# EAGLE board Thetis_RevF5_PCB (EAGLE 9.7.0)
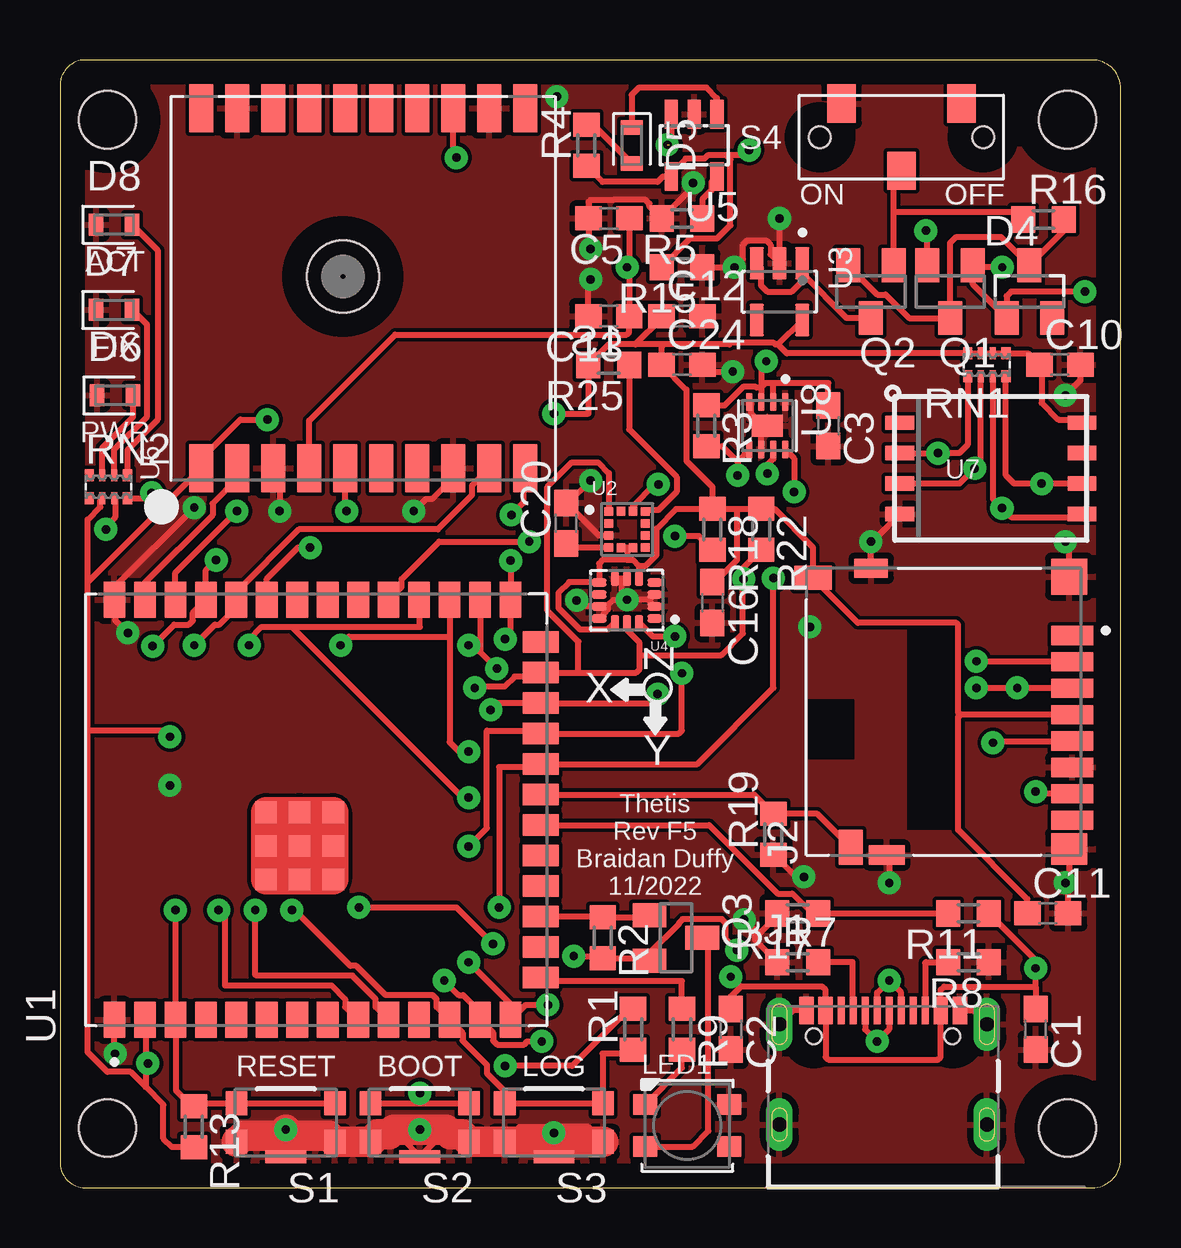
[diagram p0: board, top side]
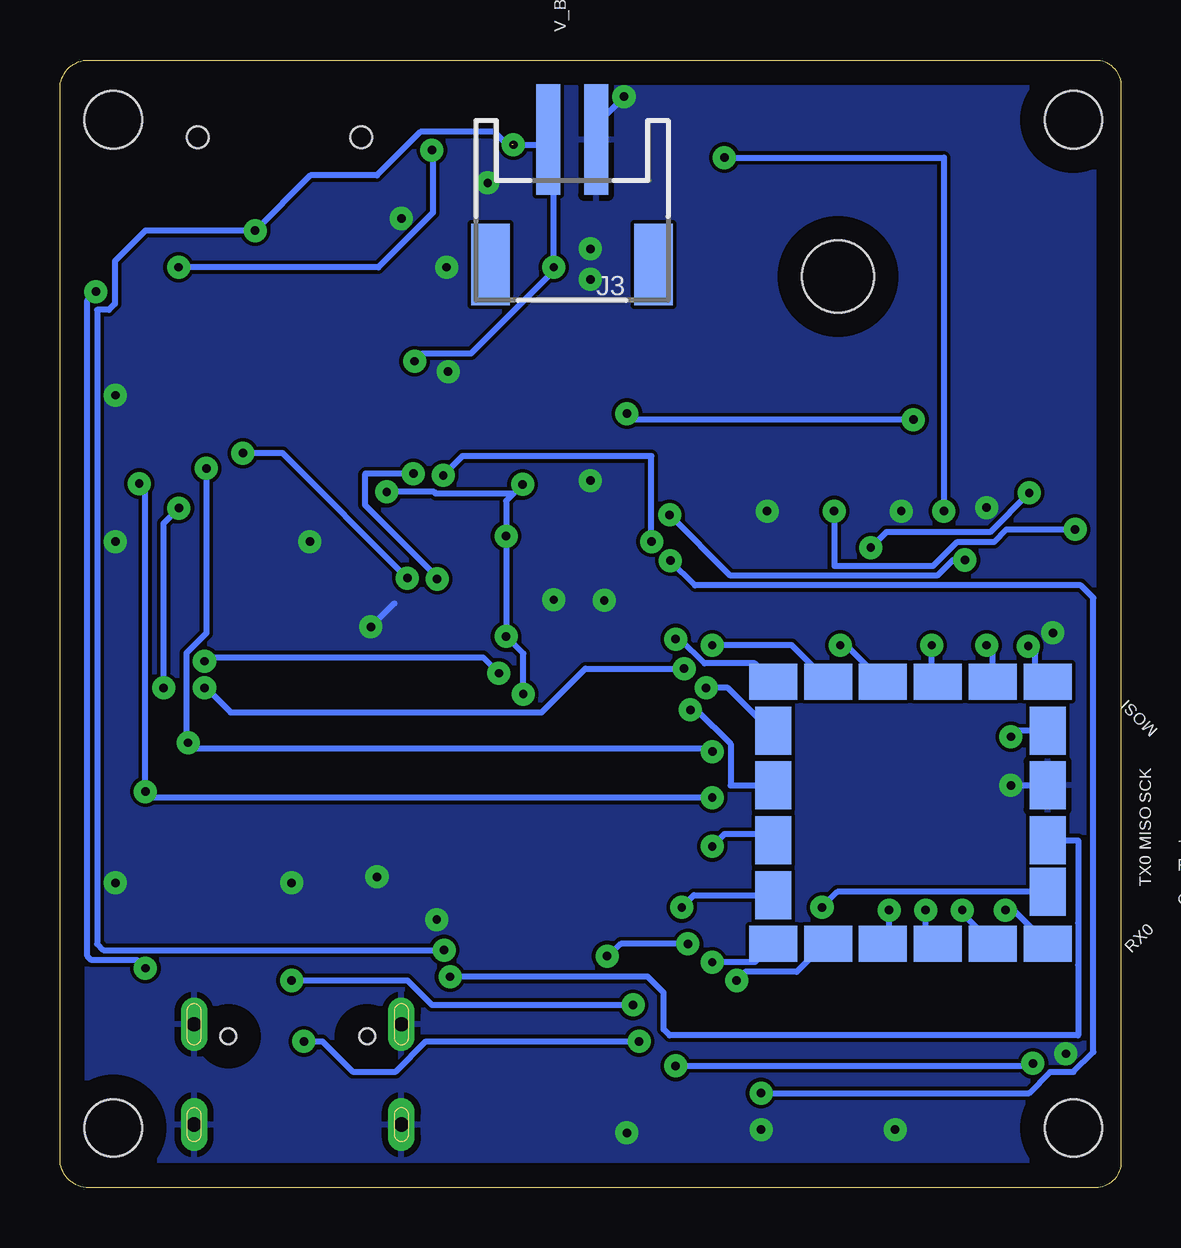
[diagram p1: board, bottom side, seen from below]

Size 44.2 x 46.99 mm. Coordinates in mm from the lower left corner, seen from the top.
Outline: 44.2,1.19 44.2,45.8 arc90 43.01,46.99 0.95,46.99 arc90 0.01,45.8 0.01,1.19 arc90 0.95,0 43.01,0 arc90 44.2,1.19
Copper layers (1*16): Top 0.035mm / dielectric 1.5mm / Bottom 0.035mm
Design rules "default *": minimum track width 6mil, minimum drill 0.3mm, track to track 6mil, track to pad 6mil, pad to pad 6mil, via to via 6mil, smd to smd 6mil, copper to edge 40mil, drill to drill 6mil, minimum pad ring 10mil, minimum via ring 12mil, stop-mask expansion 4mil, vias tented up to drill 0mil, thermal gap 10mil
Net classes: 0 default: width 0.178 mm; 1 highpower: width 0.305 mm, drill 0.483 mm; 2 lowpower: width 0.305 mm, drill 0.483 mm
Holes 2.39 mm at 1.98,2.49 1.98,44.5 41.98,44.5 41.98,2.49
tKeepout: area -0.4,42.1 to 4.4,46.9; area 39.6,42.1 to 44.4,46.9; area 39.6,0.1 to 44.4,4.9; area -0.4,0.1 to 4.4,4.9
bKeepout: area 39.6,42.1 to 44.4,46.9; area -0.4,42.1 to 4.4,46.9; area 39.6,0.1 to 44.4,4.9; area -0.4,0.1 to 4.4,4.9

## Footprints (pad centres in the part's own frame; a part is rotated, then mirrored left to right if it is on the bottom)
C0603 = smd 1.1 x 1: 1 -0.85,0; 2 0.85,0
SOT23 = smd 1 x 1.4: 1 -0.95,-1.1; 2 0.95,-1.1; 3 0,1.1
LEDC1608X65N = smd 0.612 x 0.912: A 0.75,0; C -0.75,0
LEDC1608X35N = smd 0.612 x 0.912: A 0.75,0; C -0.75,0
GCT_USB4105-GF-A = smd 0.6 x 1.15: A1_B12 -3.2,4.755; A4_B9 -2.4,4.755; B1_A12 3.2,4.755; B4_A9 2.4,4.755 | smd 0.3 x 1.15: A5 -1.25,4.755; A6 -0.25,4.755; A7 0.25,4.755; A8 1.25,4.755; B5 1.75,4.755; B6 0.75,4.755; B7 -0.75,4.755; B8 -1.75,4.755 | drill 0.6 pad 1.05 long: S1 -4.32,4.18; S4 4.32,4.18 | drill 0.6 pad 1 long: S2 -4.32,0; S3 4.32,0 | hole 0.65: 2.89,3.68; -2.89,3.68
HRS_DM3D-SF = smd 0.8 x 1.75: 1 3.2,0; 2 2.1,0; 3 1,0; 4 -0.1,0; 5 -1.2,0; 6 -2.3,0; 7 -3.4,0; 8 -4.5,0 | smd 1.3 x 1.5: S1 -5.7,0.125 | smd 1.5 x 1.5: S2 5.65,0.125 | smd 0.8 x 1.5: S3 -5.95,7.725 | smd 0.8 x 1.4: S4 6,8.375 | smd 1 x 1.55: SW-A 5.6,10.8 | smd 1.45 x 1: SW-B -5.625,9.225
JSTPH2 = smd 1 x 4.6: 1 -1,-3.7; 2 1,-3.7 | smd 1.6 x 3.4: NC1 -3.4,1.5; NC2 3.4,1.5
LED3535 = smd 1 x 0.85: 1 -1.75,0.875; 2 -1.75,-0.875; 3 1.75,-0.875; 4 1.75,0.875
R0603 = smd 1 x 1.1: 1 -0.85,0; 2 0.85,0
EXBN8V = smd 0.38 x 0.5: 1 -0.8,-0.475; 4 0.8,-0.475; 5 0.8,0.475; 8 -0.8,0.475 | smd 0.25 x 0.5: 2 -0.25,-0.475; 3 0.25,-0.475; 6 0.25,0.475; 7 -0.25,0.475
SW_KMR221GLFS = smd 0.9 x 1: 1 -2.05,0.8; 2 -2.05,-0.8; 3 2.05,-0.8; 4 2.05,0.8 | smd 1.7 x 0.55: 5 0,1.425
CL-SB-12A = smd 1.2 x 1.6: 1 -2.5,-1.4; 2 0,1.4; 3 2.5,-1.4 | hole 0.9: -3.4,0; 3.4,0
PAD-1.5X2.0 = smd 1.5 x 2: P$1 0,0
XCVR_ESP32-S2-SOLO-U-N4R2 = smd 1.5 x 0.9: 1 -8.75,8.41; 2 -8.75,7.14; 3 -8.75,5.87; 4 -8.75,4.6; 5 -8.75,3.33; 6 -8.75,2.06; 7 -8.75,0.79; 8 -8.75,-0.48; 9 -8.75,-1.75; 10 -8.75,-3.02; 11 -8.75,-4.29; 12 -8.75,-5.56; 13 -8.75,-6.83; 14 -8.75,-8.1; 27 8.75,-8.1; 28 8.75,-6.83; 29 8.75,-5.56; 30 8.75,-4.29; 31 8.75,-3.02; 32 8.75,-1.75; 33 8.75,-0.48; 34 8.75,0.79; 35 8.75,2.06; 36 8.75,3.33; 37 8.75,4.6; 38 8.75,5.87; 39 8.75,7.14; 40 8.75,8.41 | smd 0.9 x 1.5: 15 -6.985,-9.35; 16 -5.715,-9.35; 17 -4.445,-9.35; 18 -3.175,-9.35; 19 -1.905,-9.35; 20 -0.635,-9.35; 21 0.635,-9.35; 22 1.905,-9.35; 23 3.175,-9.35; 24 4.445,-9.35; 25 5.715,-9.35; 26 6.985,-9.35 | smd 0.9 x 0.9: 41_1 -2.9,2.09; 41_2 -1.5,2.09; 41_3 -0.1,2.09; 41_4 -2.9,0.69; 41_5 -1.5,0.69; 41_6 -0.1,0.69; 41_7 -2.9,-0.71; 41_8 -1.5,-0.71; 41_9 -0.1,-0.71
XDCR_LIS3MDLTR = smd 0.375 x 0.35: 1 -0.762,0.75; 2 -0.762,0.25; 3 -0.762,-0.25; 4 -0.762,-0.75; 7 0.762,-0.75; 8 0.762,-0.25; 9 0.762,0.25; 10 0.762,0.75 | smd 0.35 x 0.375: 5 -0.25,-0.762; 6 0.25,-0.762; 11 0.25,0.762; 12 -0.25,0.762
SOT95P285X140-5N = smd 1.35 x 0.6: 1 -1.185,0.95; 2 -1.185,0; 3 -1.185,-0.95; 4 1.185,-0.95; 5 1.185,0.95
PQFN50P300X250X97-14N = smd 0.61 x 0.35: 1 -1.16,0.75; 2 -1.16,0.25; 3 -1.16,-0.25; 4 -1.16,-0.75; 8 1.16,-0.75; 9 1.16,-0.25; 10 1.16,0.25; 11 1.16,0.75 | smd 0.35 x 0.61: 5 -0.5,-0.91; 6 0,-0.91; 7 0.5,-0.91; 12 0.5,0.91; 13 0,0.91; 14 -0.5,0.91
SOT23-5L = smd 0.55 x 1.2: 1 -0.95,-1.3; 2 0,-1.3; 3 0.95,-1.3; 4 0.95,1.3; 5 -0.95,1.3
FGPMMOPA6H = smd 2 x 1: P$1 -7.5,6.75; P$2 -7.5,5.25; P$3 -7.5,3.75; P$4 -7.5,2.25; P$5 -7.5,0.75; P$6 -7.5,-0.75; P$7 -7.5,-2.25; P$8 -7.5,-3.75; P$9 -7.5,-5.25; P$10 -7.5,-6.75; P$11 7.5,-6.75; P$12 7.5,-5.25; P$13 7.5,-3.75; P$14 7.5,-2.25; P$15 7.5,-0.75; P$16 7.5,0.75; P$17 7.5,2.25; P$18 7.5,3.75; P$19 7.5,5.25; P$20 7.5,6.75 | hole 3: 0.5,0.85
LGA8_8X6 = smd 1.2 x 0.6: 1 -3.8,1.905; 2 -3.8,0.635; 3 -3.8,-0.635; 4 -3.8,-1.905; 5 3.8,-1.905; 6 3.8,-0.635; 7 3.8,0.635; 8 3.8,1.905
SON50P200X200X80-9N = smd 0.76 x 0.27: 1 -0.985,0.75; 2 -0.985,0.25; 3 -0.985,-0.25; 4 -0.985,-0.75; 5 0.985,-0.75; 6 0.985,-0.25; 7 0.985,0.25; 8 0.985,0.75 | smd 0.9 x 1.3: 9 0,0

## Placement (x,y rotation side)
C1  1 uF  [C0603]  40.65,6.6 270 top
C2  1 uF  [C0603]  27.95,6.6 270 top
C3  0.1 uF  [C0603]  32.01,31.75 270 top
C5  10 uF  [C0603]  22.88,40.39 180 top
C10  1 uF  [C0603]  41.66,34.29 0 top
C11  1 uF  [C0603]  41.16,11.43 0 top
C12  1 uF  [C0603]  25.92,36.32 0 top
C13  1 uF  [C0603]  22.87,36.32 180 top
C16  0.1 uF  [C0603]  27.19,24.38 270 top
C20  0.1 uF  [C0603]  21.09,27.69 90 top
C24  0.1 uF  [C0603]  25.92,34.29 0 top
D4  BAT400  [SOT23]  40.39,37.34 0 top
D5  ORG  [LEDC1608X65N]  23.82,43.43 270 top
D6  RED  [LEDC1608X65N]  2.29,33.02 0 top
D7  RED  [LEDC1608X35N]  2.25,36.58 0 top
D8  BLU  [LEDC1608X65N]  2.25,40.13 0 top
J1  USB4105-GF-A  [GCT_USB4105-GF-A]  34.3,2.63 0 top
J2  DM3D-SF  [HRS_DM3D-SF]  42.17,19.81 90 top
J3  [JSTPH2]  22.87,39.97 180 bottom
LED1  WS2812B3535  [LED3535]  26.13,2.59 0 top
Q1  AOSS21311C  [SOT23]  37.09,37.34 180 top
Q2  AOSS21311C  [SOT23]  33.79,37.34 180 top
Q3  AOSS21311C  [SOT23]  25.66,10.41 270 top
R1  10k  [R0603]  23.88,6.6 90 top
R2  1k  [R0603]  22.61,10.41 270 top
R3  10k  [R0603]  26.93,31.75 270 top
R4  1k  [R0603]  21.93,43.43 90 top
R5  2k  [R0603]  25.92,40.39 180 top
R7  5k1  [R0603]  30.74,9.4 0 top
R8  5k1  [R0603]  37.85,9.4 180 top
R9  1k  [R0603]  25.92,6.6 270 top
R11  100k  [R0603]  37.85,11.43 180 top
R13  10k  [R0603]  5.58,2.54 270 top
R15  100k  [R0603]  25.92,38.35 180 top
R16  100k  [R0603]  40.98,40.34 0 top
R17  200k  [R0603]  30.74,11.43 180 top
R18  2.7k  [R0603]  27.19,27.43 270 top
R19  10k  [R0603]  29.73,14.73 90 top
R22  2.7k  [R0603]  29.22,27.43 270 top
R25  10k  [R0603]  22.87,34.29 180 top
RN1  10k  [EXBN8V]  38.62,34.29 180 top
RN2  1k  [EXBN8V]  2.01,29.21 0 top
S1  KMR221GLFS  [SW_KMR221GLFS]  9.41,2.72 180 top
S2  KMR221GLFS  [SW_KMR221GLFS]  14.99,2.72 180 top
S3  KMR221GLFS  [SW_KMR221GLFS]  20.58,2.72 180 top
S4  CL-SB-12X  [CL-SB-12A]  35.06,43.77 180 top
TP1  [PAD-1.5X2.0]  7.63,10.16 270 bottom
TP2  [PAD-1.5X2.0]  5.34,10.16 270 bottom
TP3  [PAD-1.5X2.0]  3.06,10.16 270 bottom
TP4  [PAD-1.5X2.0]  14.49,21.08 270 bottom
TP5  [PAD-1.5X2.0]  12.2,10.16 270 bottom
TP6  [PAD-1.5X2.0]  14.49,10.16 270 bottom
TP7  [PAD-1.5X2.0]  14.49,16.76 0 bottom
TP8  [PAD-1.5X2.0]  14.49,19.05 0 bottom
TP9  [PAD-1.5X2.0]  12.2,21.08 270 bottom
TP10  [PAD-1.5X2.0]  9.91,21.08 90 bottom
TP11  [PAD-1.5X2.0]  7.63,21.08 270 bottom
TP12  [PAD-1.5X2.0]  14.49,14.48 0 bottom
TP13  [PAD-1.5X2.0]  9.91,10.16 270 bottom
TP14  [PAD-1.5X2.0]  3.06,12.33 0 bottom
TP15  [PAD-1.5X2.0]  3.06,16.76 0 bottom
TP16  [PAD-1.5X2.0]  3.06,19.05 0 bottom
TP17  [PAD-1.5X2.0]  3.06,14.48 0 bottom
TP18  [PAD-1.5X2.0]  5.34,21.08 270 bottom
TP19  [PAD-1.5X2.0]  3.06,21.08 270 bottom
TP20  [PAD-1.5X2.0]  14.49,12.19 0 bottom
U1  ESP32-S2-SOLO-U-N4R2  [XCVR_ESP32-S2-SOLO-U-N4R2]  10.68,15.75 90 top
U2  LIS3MDLTR  [XDCR_LIS3MDLTR]  23.63,27.43 0 top
U3  AP2112K-3.3TRG1  [SOT95P285X140-5N]  29.98,37.34 270 top
U4  LSM6DSO32TR  [PQFN50P300X250X97-14N]  23.62,24.47 180 top
U5  MCP73831/OT  [SOT23-5L]  26.42,43.43 180 top
U6  [FGPMMOPA6H]  12.63,37.47 90 top
U7  XTSD  [LGA8_8X6]  38.79,29.97 0 top
U8  MAX17048G+T10  [SON50P200X200X80-9N]  29.47,31.75 270 top

## Library data of the parts
C1-C3 C5 C10-C13 C16 C20 C24 = rcl; SPICEPREFIX: C
D4 = diode
D5 D6 D8 = LED; CATEGORY: LED; COLOR: GREEN; DESCRIPTION: CHIP LED ROUND; SUB-CATEGORY: CHIP; TYPE: ROUND_TOP
D7 = LED; CATEGORY: LED; COLOR: YELLOW; DESCRIPTION: CHIP LED FLAT; SUB-CATEGORY: CHIP; TYPE: FLAT_TOP
J1 = USB4105-GF-A; AVAILABILITY: In Stock; DESCRIPTION: USB-C (USB TYPE-C) USB 2.0 Receptacle Connector 24 (16+8 Dummy) Position Surface Mount, Right Angle; Through Hole; MF: GCT; MP: USB4105-GF-A; PACKAGE: None; PRICE: None; PURCHASE-URL: https://pricing.snapeda.com/search/part/USB4105-GF-A/?ref=eda
J2 = UTL-Lib; MANUFACTURER: Hirose; MAXIMUM_PACKAGE_HEIGHT: 1.55mm; PARTREV: 2017.1; STANDARD: Manufacturer Recommendations
J3 U8 = UTL-Lib
LED1 = adafruit
Q1-Q3 = Transistor; CATEGORY: Transistor; DESCRIPTION: MOSFET P-CH 50V 130MA SOT-23; DRAIN_CURRENT: 130mA; MANUFACTURER: ON Semiconductor; MPN: BSS84; OPERATING_TEMP: -55°C ~ 150°C; PART_STATUS: Active; ROHS_COMPLIANT: Yes; SUB-CATEGORY: MOSFET; THERMALLOSS: 360mW; TYPE: P-Channel
R1-R5 R7-R9 R11 R13 R15-R19 R22 R25 = rcl; SPICEPREFIX: R
RN1 RN2 = resistor-dil-Poseidon-Edit; OC_FARNELL: unknown; OC_NEWARK: unknown
S1-S3 = KMR221GLFS; MANUFACTURER: CnK
S4 = switches; DIGIKEY: 563-1314-1-ND
TP1-TP20 U7 = microbuilder
U1 = UTL-Lib; MANUFACTURER: Espressif Systems; MAXIMUM_PACKAGE_HEIGHT: 3.35 mm; PARTREV: 1.4; SNAPEDA_PN: ESP32-S2-SOLO-U-N4R2; STANDARD: Manufacturer Recommendations
U2 = UTL-Lib; AVAILABILITY: Unavailable; DESCRIPTION: LIS3MDL Series 3 Axis ±2/±8/±12/±16 g 3.6V High Performance Magnetometer LGA-12; MAXIMUM_PACKAGE_HEIGHT: 1mm; MF: STMicroelectronics; MP: LIS3MDLTR; PACKAGE: VFLGA-12 STMicroelectronics; PARTREV: 6; PRICE: None; STANDARD: Manufacturer Recommendation
U3 = UTL-Lib; MANUFACTURER: Diodes Inc.; PARTREV: 2-2
U4 = UTL-Lib; MANUFACTURER: TDK Corporation; PARTREV: 0.4; STANDARD: IPC 7351B
U5 U6 = adafruit - EVE Edit

## Nets
3.3V: C10.1 C11.1 C12.1 C16.1 C24.1 J2.4 J2.SW-A R1.2 R13.2 R18.1 R22.1 R25.2 RN1.1 RN1.2 RN1.3 RN1.4 RN2.2 TP16.P$1 U1.2 U2.5 U2.6 U3.5 U4.5 U4.8 U4.12 U6.P$1 U7.8
!BATT_ALERT: R3.2 U1.31 U8.5
!GPS_RST: U1.39 U6.P$2
!LOG_EN: R1.1 S3.2 S3.3 TP13.P$1 U1.12
!NEO_EN: Q3.1 R2.1 U1.17
!RST: R13.1 S1.2 S1.3 TP3.P$1 U1.3
ACT_LED: RN2.4 U1.35
BOOT: S2.2 S2.3 TP4.P$1 U1.27
CC1: J1.A5 R7.2
CC2: J1.B5 R8.2
EPAD: U1.41_1 U1.41_2 U1.41_3 U1.41_4 U1.41_5 U1.41_6 U1.41_7 U1.41_8 U1.41_9
ESP_RX0: TP18.P$1 U1.36 U6.P$9
ESP_RX1: TP2.P$1 U1.9
ESP_TX0: TP19.P$1 U1.37 U6.P$10
ESP_TX1: TP1.P$1 U1.10
GND: C1.2 C2.2 C3.2 C5.2 C10.2 C11.2 C12.2 C13.2 C16.2 C20.2 C24.2 D6.C D7.C D8.C J1.A1_B12 J1.B1_A12 J1.S1 J1.S2 J1.S3 J1.S4 J2.6 J2.S1 J2.S2 J2.S3 J2.S4 J3.1 LED1.4 R5.2 R7.1 R8.1 R15.1 R17.2 R19.1 S1.1 S1.4 S1.5 S2.1 S2.4 S2.5 S3.1 S3.4 S3.5 S4.3 TP15.P$1 U1.1 U1.40 U2.3 U3.2 U4.2 U4.3 U4.6 U4.7 U4.10 U4.11 U5.2 U6.P$3 U6.P$8 U6.P$12 U6.P$19 U7.4 U8.1 U8.4 U8.6 U8.9
GPS_PPS: U1.38 U6.P$13
MISO: J2.7 RN1.8 TP11.P$1 U1.30 U7.6
MOSI: J2.3 RN1.7 TP9.P$1 U1.28 U7.5
N$1: Q2.1 R16.1 S4.2
N$2: D7.A RN2.6
N$3: D8.A RN2.5
N$4: Q2.3 U3.1 U3.3
N$5: LED1.2 Q3.3
N$6: D6.A RN2.7
N$7: C20.1 U2.4
N$8: LED1.1 R9.2
N$9: RN2.3 U6.P$5
N$13: D4.3 Q1.3 Q2.2 R16.2
N$15: R25.1 U2.10
N$20: D5.A R4.2
N$21: D5.C U5.1
N$22: R5.1 U5.5
NEO_DATA: R9.1 U1.15
SCK: J2.5 RN1.6 TP10.P$1 U1.29 U7.3
SCL: R22.2 TP8.P$1 U1.25 U2.1 U4.13 U8.7
SD_CD: J2.SW-B R19.2 U1.21
SD_CS: J2.2 TP12.P$1 U1.23
SDA: R18.2 TP7.P$1 U1.24 U2.11 U4.14 U8.8
USB_DN: J1.A7 J1.B7 TP5.P$1 U1.13
USB_DP: J1.A6 J1.B6 TP6.P$1 U1.14
USB_MON: R11.2 R17.1 U1.20
V_BATT: C3.1 C5.1 C13.1 J3.2 Q1.2 Q3.2 R2.2 R3.1 TP14.P$1 U5.3 U6.P$4 U8.2 U8.3
V_USB: C1.1 C2.1 D4.1 J1.A4_B9 J1.B4_A9 Q1.1 R4.1 R11.1 R15.2 TP17.P$1 U5.4
XTSD_CS: RN1.5 TP20.P$1 U1.22 U7.2

## Tracks (layer width: path | path; a pad name or v marks a point on that pad's centre or on a via)
3.3V  (via drill 0.35)
  Top 0.254: R13.2 4.67,1.69 4.31,2.04 4.31,3.46 3.56,4.21 | 3.56,5.08 3.56,6.97 U1.2 | 3.56,5.08 3.56,4.21 | 3.56,4.21 2.94,4.83 1.98,4.83 1.15,5.66 1.15,19.05 | 23.63,26.67 U2.5 | 23.63,26.67 U2.6 | 23.63,26.16 22.61,26.16 22.46,26.01 U4.8 22.45,25.24 21.21,25.24 20.77,24.79 20.77,24.16 21.66,23.27 22.83,23.27 23.05,23.48 23.05,23.49 U4.12 | 23.63,26.16 23.88,26.16 24.12,25.92 | 24.12,25.92 U4.5 | 23.63,26.67 23.63,26.16 | R18.1 28.2,28.28 | 28.2,28.28 R22.1 29.77,28.28 31.37,26.68 J2.SW-A 33.24,23.54 37.35,23.54 37.42,23.46 37.42,19.81 37.52,19.71 | RN2.2 1.68,28.65 1.68,28.37 1.15,27.84 1.15,25.24 | 1.15,25.24 4.11,28.2 4.13,28.2 4.58,28.64 4.58,28.67 U6.P$1 5.89,30.37 7.52,32 v8.64,32 | J2.4 37.52,19.71 | C11.1 40.31,12.03 37.42,14.91 37.42,19.61 37.52,19.71 | C12.1 25.07,36.23 23.98,35.14 | 23.98,35.14 22.86,35.14 R25.2 22.02,32.26 v20.58,32.26 | U3.5 29.91,35.14 | 25.15,35.14 23.98,35.14 | 29.91,35.14 30.28,34.77 RN1.4 RN1.3 RN1.2 RN1.1 40.34,34.77 C10.1 40.9,34.2 40.9,32.71 41.6,32.01 42.46,32.01 U7.8 | v4.58,18.79 4.32,19.05 1.15,19.05 | 24.12,25.92 24.41,25.92 24.86,26.38 24.86,27.46 25.68,28.28 R18.1 | C16.1 27.28,25.23 28.2,26.15 28.2,28.28 | R1.2 23.72,7.45 21.34,5.08 v18.55,5.08 | v3.66,5.18 3.56,5.08 | 1.15,19.05 1.15,25.24 | 25.15,35.14 25.07,35.05 C24.1 26.1,33.25 26.1,30.28 27.19,29.2 R18.1 | 25.15,35.14 27.89,35.14 27.95,35.2 29.74,35.2 29.8,35.14 29.91,35.14
  Bottom 0.254: v8.64,32 20.33,32 v20.58,32.26 | TP16.P$1 4.32,19.05 v4.58,18.79 | v18.55,5.08 3.76,5.08 v3.66,5.18
!BATT_ALERT  (via drill 0.35)
  Top 0.254: U1.31 14.24,25.04 14.24,25.36 15.8,26.92 v19.55,26.92 | U8.5 28.72,30.75 28.23,30.26 | 28.23,30.26 v28.23,29.68 | R3.2 27.59,30.9 28.23,30.26
  Bottom 0.254: v19.55,26.92 19.57,26.94 19.57,30.48 27.44,30.48 v28.23,29.68
!GPS_RST
  Top 0.254: U6.P$2 7.39,29.53 6.35,28.5 6.35,28.03 3.54,25.21 U1.39
!LOG_EN  (via drill 0.35)
  Top 0.254: S3.3 18.55,3.52 | 18.55,3.52 S3.2 22.61,3.53 22.61,5.59 23.72,5.59 R1.1 | v9.66,11.57 9.78,11.57 12.1,9.25 12.35,9.25 13.57,8.03 15.53,8.03 15.69,7.86 15.69,7.54 U1.12 16.78,6.46 16.78,6.13 17.79,5.12 17.79,4.77 18.55,4.01 18.55,3.52
  Bottom 0.254: TP13.P$1 9.66,10.41 v9.66,11.57
!NEO_EN
  Top 0.254: Q3.1 24.55,11.3 24.51,11.26 R2.1 22.57,11.3 U1.17
!RST  (via drill 0.35)
  Top 0.254: R13.1 5.67,3.48 | 5.67,3.48 5.7,3.52 S1.3 S1.2 | 5.67,3.48 5.42,3.48 4.83,4.06 4.83,6.97 U1.3 v4.81,11.57
  Bottom 0.254: TP3.P$1 4.46,11.57 v4.81,11.57
ACT_LED  (via drill 0.35)
  Top 0.254: RN2.4 3.6,28.73 v3.82,28.96 | U1.35 8.62,25.37 9.91,26.67 v10.42,26.67
  Bottom 0.254: v3.82,28.96 5.45,27.32 9.77,27.32 v10.42,26.67
BOOT  (via drill 0.35)
  Top 0.254: S2.3 14.99,3.52 | 14.99,3.52 S2.2 | v18.55,22.86 18.78,23.09 U1.27 v18.78,26.13 v18.77,26.13 | 14.99,3.52 v14.99,3.94
  Bottom 0.254: v18.55,22.86 18.35,22.86 17.34,21.85 15.25,21.85 TP4.P$1 | v14.99,3.94 3.82,3.94 2.94,4.83 1.98,4.83 1.15,5.66 1.15,24.58 1.67,25.1 17.74,25.1 v18.77,26.13
CC1
  Top 0.254: J1.A5 33.03,7.41 33.03,9.4 R7.2
CC2
  Top 0.254: J1.B5 36.05,9.37 36.08,9.4 R8.2
EPAD
  Top 1.27: U1.41_3 U1.41_6 | U1.41_6 U1.41_9 | U1.41_9 U1.41_8 | U1.41_8 U1.41_7 | U1.41_7 U1.41_4 | U1.41_4 U1.41_1 | U1.41_1 U1.41_2 | U1.41_2 U1.41_3 | U1.41_5 U1.41_6 | U1.41_5 U1.41_9 | U1.41_5 U1.41_8 | U1.41_5 U1.41_7 | U1.41_5 U1.41_4 | U1.41_5 U1.41_1 | U1.41_5 U1.41_2 | U1.41_5 U1.41_3
ESP_RX0  (via drill 0.35)
  Top 0.254: U6.P$9 17.16,29.25 17.16,28.86 15.74,27.43 9.96,27.43 7.35,24.82 U1.36 7.35,24.17 6.64,23.47 6.46,23.47 v5.6,22.61
  Bottom 0.254: TP18.P$1 5.34,22.35 v5.6,22.61
ESP_RX1  (via drill 0.35)
  Top 0.254: U1.9 11.88,7.54 11.88,7.86 11.31,8.43 6.87,8.43 6.87,11.31 v6.61,11.57
  Bottom 0.254: TP2.P$1 6.61,11.43 v6.61,11.57
ESP_TX0  (via drill 0.35)
  Top 0.254: U6.P$10 19.31,29.9 19.31,28.54 v18.81,28.04 | v6.5,26.16 6.08,25.73 U1.37 5.53,23.96 5.53,23.63 5.37,23.47 4.76,23.47 v3.86,22.57
  Bottom 0.254: v6.5,26.16 7,26.16 7.65,25.5 16.27,25.5 v18.81,28.04 | TP19.P$1 3.56,21.59 3.56,22.28 v3.86,22.57
ESP_TX1  (via drill 0.35)
  Top 0.254: U1.10 13.15,7.54 13.15,7.86 12.18,8.84 8.19,8.84 8.14,8.89 v8.14,11.57
  Bottom 0.254: TP1.P$1 8.14,10.67 v8.14,11.57
GND  (via drill 0.35)
  Top 0.254: U4.6 U4.7 23.38,25.13 23.38,24.75 v23.63,24.5 | 24.56,24.5 U4.3 | 24.56,24.5 v23.63,24.5 | U4.2 24.56,24.44 24.56,24.5 | 22.83,24.27 22.51,24.27 U4.10 21.78,24.22 v21.52,24.48 | v23.63,24.5 23.06,24.5 22.83,24.27 | U4.11 22.67,23.93 22.83,24.09 22.83,24.27 | J2.S4 v33.79,26.92 33.84,26.92 U7.4 | J2.S1 42.05,12.83 41.92,12.7 | C11.2 42.01,12.61 41.92,12.7 | J2.S3 34.55,13.76 v34.55,12.7 | R19.1 30.65,12.95 v31,12.95 | R17.2 29.89,11.34 28.96,10.41 | R7.1 28.96,10.33 28.96,10.41 | S3.4 19.16,2.54 20.58,2.54 | S3.5 v20.58,2.29 20.58,2.54 | S3.1 22.01,2.54 20.58,2.54 | 17.28,1.92 S2.1 15.62,1.92 S2.5 14.25,2.03 13.06,2.03 S2.4 | S1.4 7.37,1.92 | S1.5 v9.41,2.42 | v22.11,39.12 22.03,39.2 C5.2 22.03,41.07 22.11,41.15 23.04,41.15 23.06,41.16 24.39,41.16 24.56,41 24.56,40.9 R5.2 26.38,41.7 v26.38,41.87 | v29.98,40.39 U3.2 29.61,38.89 29.61,39.29 29.42,39.48 28.64,39.48 28.45,39.29 28.45,38.71 v28.1,38.35 R15.1 | U2.3 22.44,27.18 C20.2 21.18,28.54 v22.11,29.46 | v2.29,5.58 2.27,5.61 U1.1 | v2.83,23.12 2.29,23.65 2.29,24.47 U1.40 2.27,25.01 v5.6,28.34 | 41.92,12.7 v41.89,12.7 | J2.S2 42.05,26.77 v41.89,26.92 | C10.2 42.51,33.64 v41.89,33.02 | 28.96,10.41 28.96,10.72 v28.51,11.17 | J1.A1_B12 30.55,7.39 J1.S1 | J1.B1_A12 38.04,7.39 J1.S4 | U6.P$3 9.15,29.71 v9.15,28.19 | C13.2 22.02,37.76 v22.11,37.85 | U8.6 29.22,31.5 29.34,31.62 | 29.34,31.62 U8.9 | v14.74,28.19 15.24,28.7 15.5,28.7 16.39,29.58 U6.P$8 | U8.4 28.81,32.65 28.81,32.26 29.34,31.72 29.34,31.62 | C24.2 27.05,34.01 v28.03,34.01
  Top 1.27: 7.37,1.92 7.63,2.17 9.15,2.17 v9.41,2.42 9.66,2.17 11.2,2.17 S1.1 S2.4 13.26,2.23 13.72,2.23 13.92,2.42 v14.99,2.42 16.07,2.42 16.27,2.23 16.73,2.23 S2.1 | S3.1 S3.4 17.28,1.92
  Bottom 0.254: v4.58,16.76 TP15.P$1 | 30.27,24.35 v31.25,23.37 | v20.7,45.47 21.87,44.3 J3.1
  pour Top: -1.64,-1.14 46.62,-1.14 46.62,47.88 -1.64,47.88
  pour Bottom: -1.64,-1.14 46.62,-1.14 46.62,47.88 -1.64,47.88
GPS_PPS  (via drill 0.35)
  Top 0.254: U1.38 4.81,25.63 v7.37,28.19 | v16.52,42.93 16.39,43.06 U6.P$13
  Bottom 0.254: v7.37,28.19 7.37,42.93 v16.52,42.93
MISO  (via drill 0.35)
  Top 0.254: U7.6 v40.9,29.34 39.76,29.34 39.42,29.68 RN1.8 | J2.7 40.75,16.41 v40.65,16.51 | v17.03,16.26 16.77,16.26 9.66,23.37 | v7.88,22.61 7.88,22.86 8.39,23.37 9.66,23.37 | 9.66,23.37 14.99,23.37 14.99,24.47 U1.30
  Bottom 0.254: v40.9,29.34 40.65,29.08 v40.65,16.51 40.39,16.26 v17.03,16.26 | TP11.P$1 7.88,21.34 v7.88,22.61
MOSI  (via drill 0.35)
  Top 0.254: U7.5 42.46,27.94 39.63,27.94 v39.25,28.32 38.87,28.7 38.87,30.29 RN1.7 | J2.3 39.9,20.81 v39.89,20.83 v38.18,20.83 | v18.2,21.64 17.51,22.33 17.51,22.61 | U1.28 17.51,22.61 | v17.03,22.61 17.51,22.61
  Bottom 0.254: v39.89,20.83 39.89,27.69 v39.25,28.32 | v38.18,20.83 38.11,20.83 37.09,19.81 24.14,19.81 22.31,21.64 v18.2,21.64 | TP9.P$1 13.72,22.61 v17.03,22.61
N$1
  Top 0.254: Q2.1 34.74,40.64 | 34.74,40.64 34.74,42.05 S4.2 | R16.1 39.84,40.64 34.74,40.64
N$2
  Top 0.254: D7.A 3.63,35.95 3.63,32.13 2.26,30.77 RN2.6
N$3
  Top 0.254: D8.A 4.07,39.06 4.07,32 2.81,30.74 RN2.5
N$4
  Top 0.254: U3.3 29.22,38.34 29.22,37.59 29.47,37.34 30.49,37.34 30.93,37.78 30.93,38.1 | 30.93,38.1 U3.1 | Q2.3 32.79,36.24 30.93,38.1
N$5
  Top 0.254: Q3.3 27.02,10.09 27.02,2.37 26.36,1.72 LED1.2
N$6
  Top 0.254: D6.A 3.04,32.12 1.76,30.84 RN2.7
N$7
  Top 0.254: C20.1 21.26,26.67 U2.4
N$8
  Top 0.254: LED1.1 25.92,5 R9.2
N$9  (via drill 0.35)
  Top 0.254: U6.P$5 11.89,28.25 v11.95,28.19 | RN2.3 2.29,28.7 2.29,27.94 1.91,27.56 v1.91,27.43
  Bottom 0.254: v1.91,27.43 4.77,27.43 5.28,26.92 6.82,26.92 7.82,25.91 11.94,25.91 v11.94,28.19 v11.95,28.19
N$13
  Top 0.254: Q2.2 34.06,37.22 34.41,37.22 35.38,36.24 Q1.3 37.09,39.37 37.35,39.62 39.21,39.62 D4.3 41.83,39.88 R16.2
N$15
  Top 0.254: U2.10 24.44,28.23 24.93,28.23 25.69,28.99 25.69,29.62 23.72,31.59 R25.1
N$20
  Top 0.254: R4.2 22.22,44.28 D5.A
N$21
  Top 0.254: D5.C 23.82,45.53 24.14,45.85 26.93,45.85 27.37,45.41 U5.1
N$22
  Top 0.254: R5.1 26.77,41.18 27.14,41.55 27.14,41.9 U5.5
NEO_DATA
  Top 0.254: R9.1 25.92,8.61 20.18,8.61 U1.15
SCK  (via drill 0.35)
  Top 0.254: RN1.6 38.37,30.23 v38.11,29.97 37.47,29.34 U7.3 | J2.5 38.94,18.61 v38.87,18.54 | U1.29 16.24,22.96 | 16.24,22.96 16.24,18.57 16.63,18.18 v17.02,18.18 | v11.69,22.61 12.05,22.96 16.24,22.96
  Bottom 0.254: v38.11,29.97 38.11,23.11 38.94,22.28 38.94,18.61 v38.87,18.54 38.62,18.29 17.13,18.29 v17.02,18.18 | TP10.P$1 11.44,22.61 v11.69,22.61
SCL  (via drill 0.35)
  Top 0.254: U4.13 23.67,23.52 23.67,23.19 24.16,22.7 24.16,22.2 | R22.2 28.45,25.82 28.45,25.4 | 21.6,21.46 U1.25 19.86,21.3 18.94,21.3 18.52,20.88 17.33,20.88 v17.28,20.83 | 21.6,21.46 24.01,21.46 24.16,21.61 24.16,22.2 | U2.1 22.87,29.78 22.42,30.22 21.33,30.22 20.31,29.2 20.31,24.04 21.6,22.76 21.6,21.46 | 24.16,22.2 27.55,22.2 28.45,23.1 28.45,25.4 | U8.7 29.72,30.38 29.48,30.13 v29.48,29.75 | v28.49,25.36 28.45,25.4
  Bottom 0.254: TP8.P$1 14.6,19.05 16.38,20.83 v17.28,20.83 | v29.48,29.75 31.47,29.75 31.5,29.72 31.5,28.45 28.49,25.43 v28.49,25.36
SD_CD
  Top 0.254: J2.SW-B 31.55,15.58 R19.2 28.92,16.38 U1.21
SD_CS  (via drill 0.35)
  Top 0.254: v38.18,21.94 38.21,21.91 J2.2 | v17.03,14.22 17.79,14.99 17.79,19.05 19.9,19.05 U1.23 25.79,18.92 25.92,19.05 v25.92,21.44
  Bottom 0.254: v38.18,21.94 38.02,22.1 26.58,22.1 v25.92,21.44 | TP12.P$1 14.74,14.73 16.52,14.73 v17.03,14.22
SDA  (via drill 0.35)
  Top 0.254: U4.14 24.2,23.49 24.2,23.48 24.71,22.97 v25.62,22.97 | v24.9,20.57 24.52,20.19 U1.24 18.22,20.19 v17.94,19.91 | U2.11 23.88,28.43 24.76,29.31 v24.93,29.31 | v25.62,27.15 26.62,27.15 R18.2 | v30.59,28.99 30.59,30.4 U8.8
  Bottom 0.254: TP7.P$1 16.26,16.76 16.26,18.49 17.69,19.91 v17.94,19.91 | v24.9,20.57 24.9,22.26 v25.62,22.97 v25.62,27.15 25.62,28.62 v24.93,29.31 25.31,28.93 28.55,28.93 28.62,28.99 v30.59,28.99
USB_DN  (via drill 0.35)
  Top 0.254: J1.B7 33.55,6.59 v34.04,6.1 34.55,6.6 J1.A7 | v20.07,6.1 19.47,6.1 19.34,5.97 18.21,5.97 18.05,6.13 18.05,6.46 U1.13 17.51,7.32 16.8,8.03 16.62,8.03 v16.01,8.64
  Bottom 0.254: v20.07,6.1 28.96,6.1 30.21,4.84 32.02,4.84 33.27,6.1 v34.04,6.1 | TP5.P$1 12.34,10.16 13.51,8.99 15.65,8.99 v16.01,8.64
USB_DP  (via drill 0.35)
  Top 0.254: J1.A6 34.05,8.13 v34.55,8.64 35.05,8.14 J1.B6 | U1.14 18.85,7.07 | 18.85,7.07 19.4,7.62 v20.33,7.62 | v17.03,9.4 18.85,7.58 18.85,7.07
  Bottom 0.254: v20.33,7.62 28.71,7.62 29.73,8.64 v34.55,8.64 | TP6.P$1 15.25,9.4 v17.03,9.4
USB_MON
  Top 0.254: R11.2 R17.1 31.34,11.43 30.51,12.26 29.9,12.26 27.05,15.11 U1.20
V_BATT  (via drill 0.35)  (1 unrouted)
  Top 0.254: 25.41,44.67 U5.3 25.47,43.62 v25.31,43.46 | 23.73,40.14 C5.1 23.73,38.45 v23.63,38.35 23.72,38.27 C13.1 23.72,35.65 23.61,35.54 13.96,35.54 10.39,31.97 U6.P$4 | Q1.2 36.14,39.81 v36.08,39.88 | v12.45,11.68 16.52,11.68 v18.04,10.16 | v21.41,9.65 22.53,9.65 R2.2 24.46,9.56 Q3.2 24.56,9.77 25.78,10.99 25.78,11.03 25.95,11.19 27.58,11.19 27.75,11.02 27.75,10.36 v28.2,9.91 | 29.22,33.36 29.22,34.29 29.28,34.29 v29.43,34.44 | 29.22,33.36 U8.3 | U8.2 29.72,33.52 29.73,33.53 | 29.73,33.53 29.39,33.53 29.22,33.36 | C3.1 32.01,33.53 29.73,33.53 | R3.1 27.7,32.6 28.49,33.39 28.95,33.39 28.99,33.36 29.22,33.36
  Bottom 0.254: 25.38,43.46 24.08,43.46 | 24.08,43.46 J3.2 | 24.08,43.46 23.63,43.01 v23.63,38.35 23.63,38.22 27.08,34.77 29.1,34.77 v29.43,34.44 | TP14.P$1 11.81,12.33 v12.45,11.68 | v18.04,10.16 20.84,10.16 21.34,9.65 v21.41,9.65 | v28.2,9.91 42.4,9.91 42.65,10.16 42.65,36.58 42.17,36.58 41.92,36.83 41.92,38.61 40.65,39.88 v36.08,39.88 33.77,42.18 31,42.18 29.19,43.99 26.11,43.99 25.57,43.46 v25.31,43.46
V_USB  (via drill 0.35)
  Top 0.254: R4.1 22.61,41.91 24.9,41.91 25.12,42.13 U5.4 25.62,42.28 25.62,42.44 26.07,42.88 26.85,42.88 26.98,43.01 27.76,43.01 | 40.65,8.38 36.84,8.38 36.7,8.24 J1.B4_A9 36.7,5.45 36.58,5.33 32.01,5.33 31.9,5.45 J1.A4_B9 31.9,8.24 31.76,8.38 28.37,8.38 | 40.65,8.38 C1.1 | 28.37,8.38 27.95,7.96 C2.1 | R11.1 40.65,9.49 v40.65,9.15 40.65,8.38 | v42.71,37.34 39.63,37.34 39.44,37.15 D4.1 38.04,37.64 Q1.1 38.13,38.35 v39.26,38.35 | v27.95,8.79 27.96,8.79 28.37,8.38 | 27.76,43.01 27.93,42.85 27.93,40.1 27.38,39.56 26.27,39.56 R15.2 | v28.71,43.23 28.49,43.01 27.76,43.01
  Bottom 0.254: v42.71,37.34 43.06,36.98 43.06,9.65 42.89,9.49 40.99,9.49 v40.65,9.15 | TP17.P$1 1.79,14.48 1.79,11.04 1.78,11.03 1.78,9.29 1.79,9.29 1.79,6.35 18.8,6.35 19.06,6.6 19.06,8.13 19.72,8.79 v27.95,8.79 | v28.71,43.23 28.66,43.23 28.66,40.63 30.94,38.35 v39.26,38.35
XTSD_CS  (via drill 0.35)
  Top 0.254: RN1.5 37.82,30.95 37.47,30.61 v36.58,30.61 U7.2 | v29.73,25.4 29.73,20.83 26.55,17.65 U1.22 19.9,17.53 18.3,17.53 v18.3,11.68
  Bottom 0.254: v29.73,25.4 34.93,30.61 v36.58,30.61 | v18.3,11.68 17.79,12.19 TP20.P$1

## Text on the board
tPlace: ON | OFF | ACT | FIX | PWR | X | Z | Y | Thetis / Rev F5 / Braidan Duffy / 11/2022 | RESET | BOOT | LOG
tSilk: 1S
_bsilk: V_BATT | MOSI | 3V3 | SCL | SCK | GND | D- | D+ | MISO | SDA | TX1 | RX1 | TX0 | CS | RX0 | V_USB